# Altium PCB football_robot_main_board.PcbDoc
Units mm, origin at the board's own origin, x right, y up, seen from the top; angles counter-clockwise.
Board outline 50 x 50 mm, 2 copper layers (Top Layer, Bottom Layer), stack 1.571 mm thick; 75 components, 68 nets, 313 pads, 120 vias.
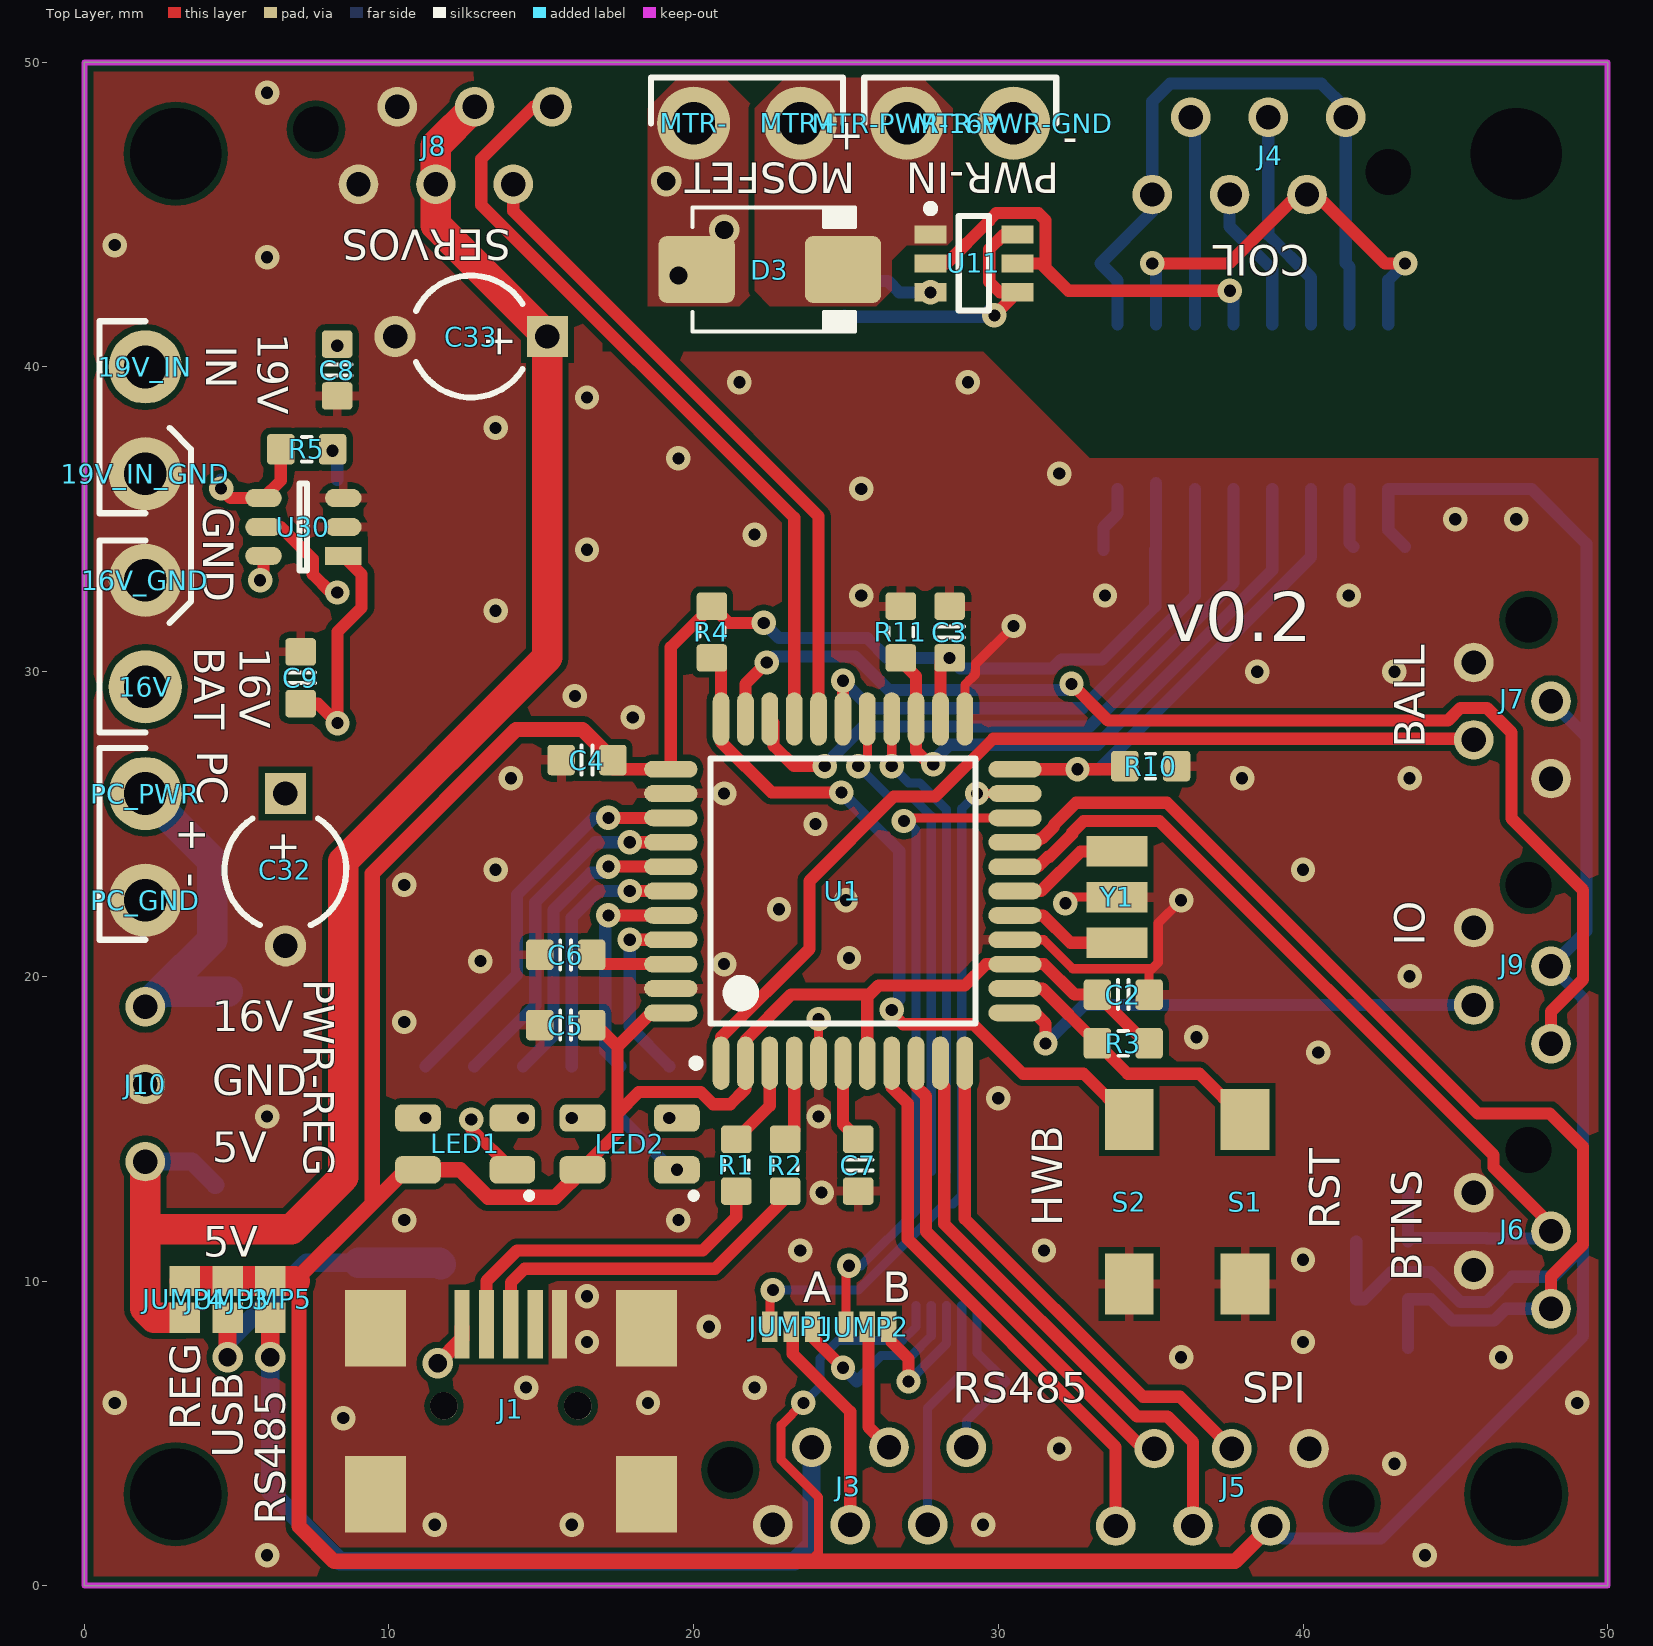
[diagram p0: Top Layer view]
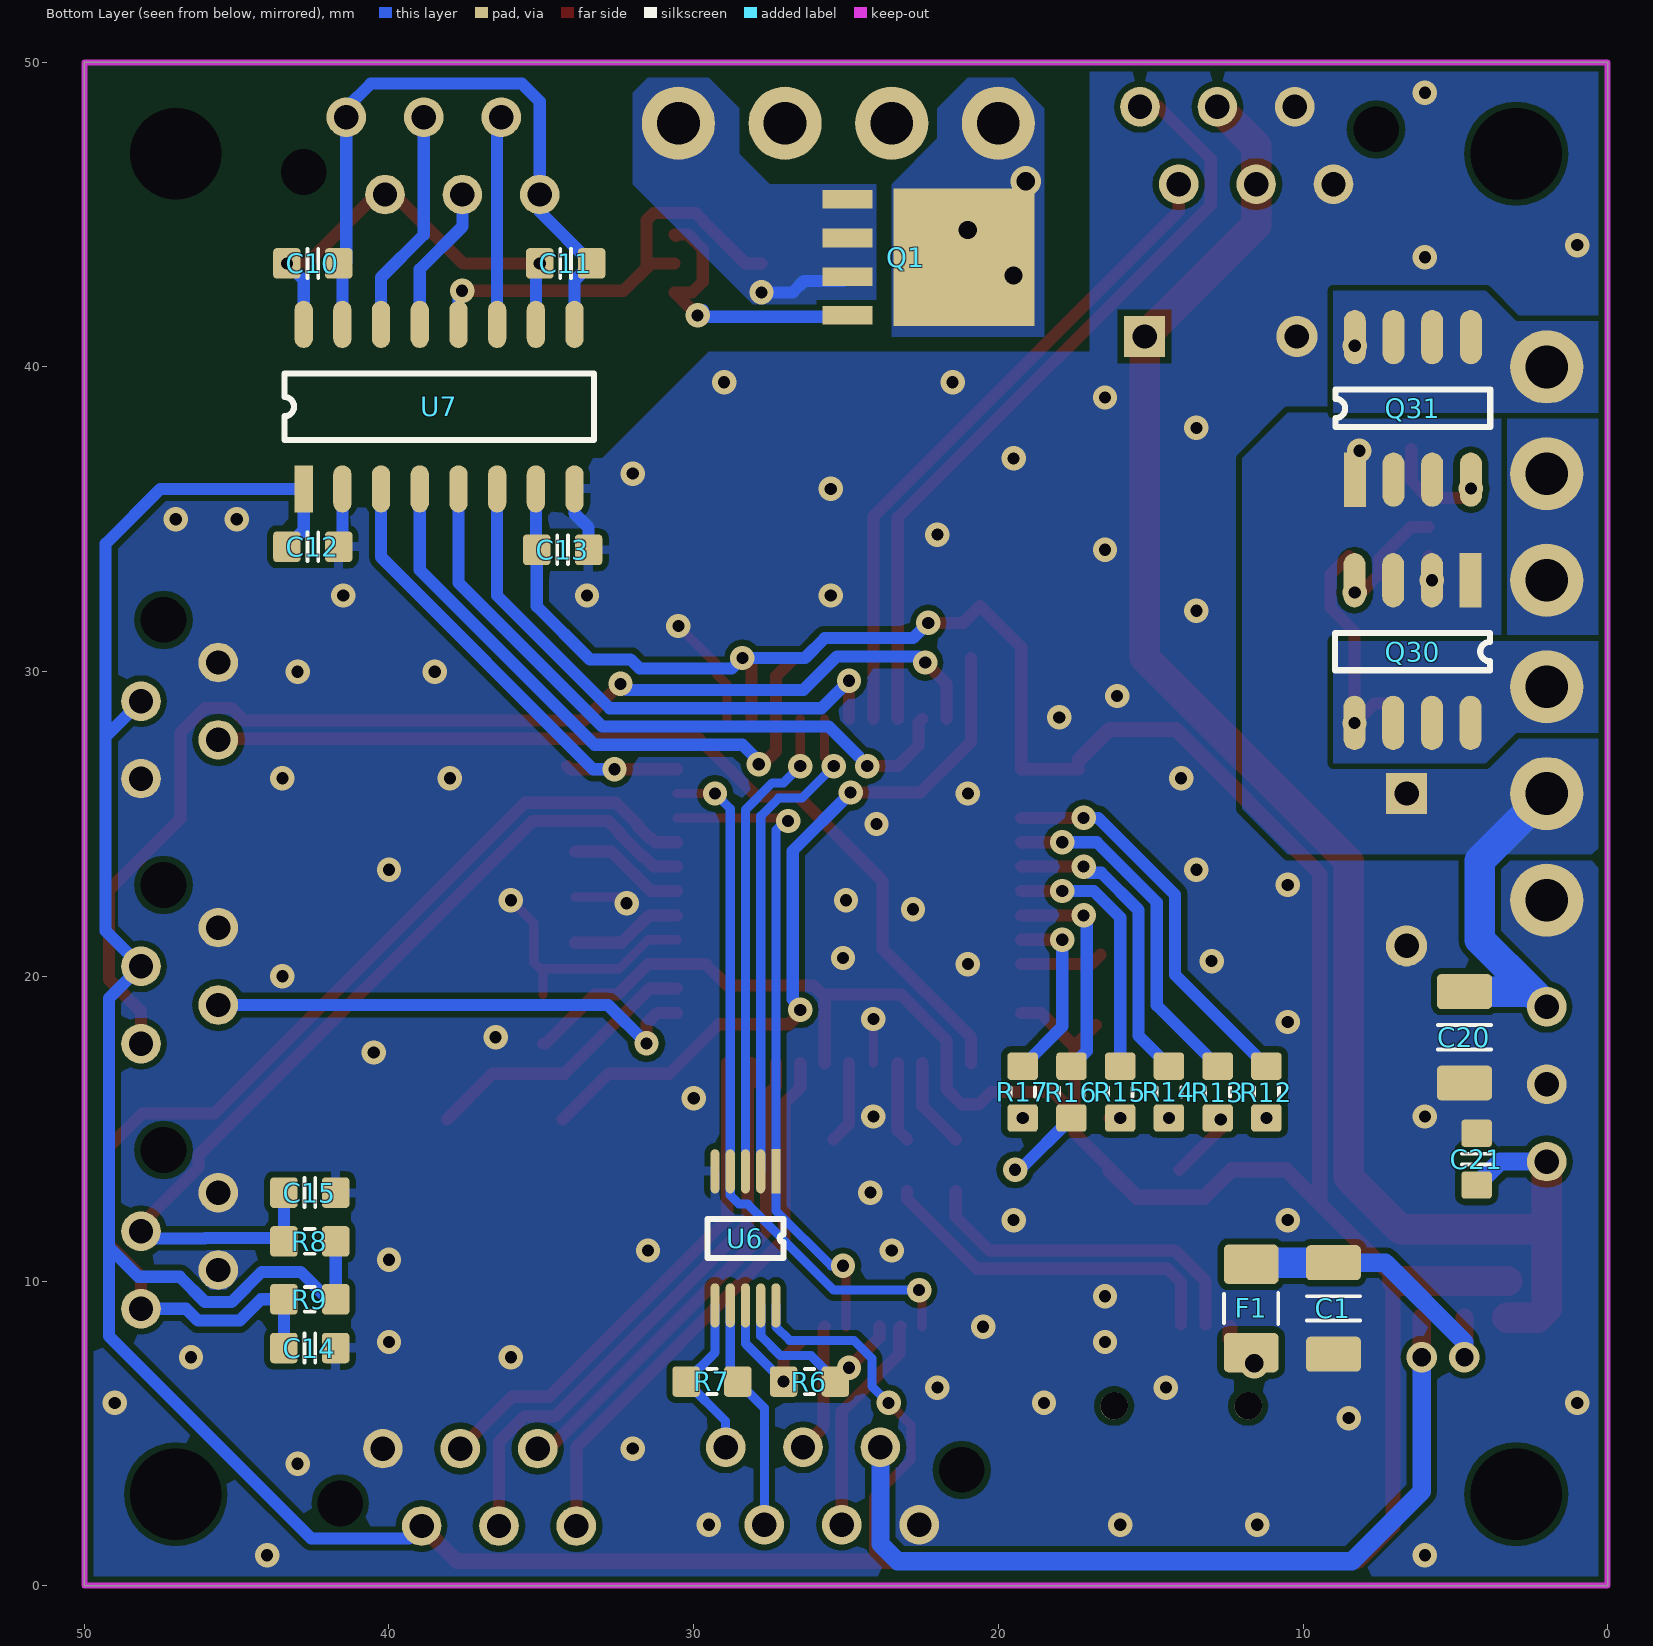
[diagram p1: Bottom Layer view, seen from below]

## Layer stack, top to bottom
Top Solder: solder mask 0.0102, Solder Resist, Dk 3.5
Top Layer: signal copper 0.0356
Dielectric 1: dielectric 1.5, FR-4, Dk 4.8
Bottom Layer: signal copper 0.0356
Bottom Solder: solder mask 0.0102, Solder Resist, Dk 3.5

## Board outline
0,0 50,0 50,50 0,50

## Design rules (kind name [scope] priority, off if disabled: settings)
Clearance [All] p1: gap=0.2
ComponentClearance [All] p1: gap=0.1 collisioncheckmode=3 verticalgap=0.1 showdistances=FALSE
HoleSize [All] p1: absolutevalues=TRUE maxlimit=10 minlimit=0.3 maxpercent=80.000 minpercent=20.000
PolygonConnect PolygonConnectDirect [All vs IsVia or InNet('Net19V_IN_1') or InNet('Net16V_1') or InNet('16V_PC') or InNet('EXT_GND') or InNet('EXT_16V') or InNet('NetD3_A') or HasFootprint('POWER-VIA') or Incomponent('C32') or Incomponent('C33') or Incomponent('J1') or HasFootprint('MICRO-MATCH-4') or HasFootprint('MICRO-MATCH-6') or HasFootprint('PIN-HEADER-3')  or Incomponent('C1') or Incomponent('C20') or Incomponent('C21')] p1: connectstyle=Direct reliefconductorwidth=0.254 reliefentries=4 polygonreliefangle="90 Angle" airgapwidth=0.254
PolygonConnect [All] p2: connectstyle=Relief reliefconductorwidth=0.3 reliefentries=4 polygonreliefangle="90 Angle" airgapwidth=0.2
RoomDefinition football_robot_main_board [InComponentClass('football_robot_main_board')] p1: confinementstyle=ConfineIn formatcopy=TRUE lockcomponents=FALSE outline -7.6,-7.6 57,-7.6 57,54.4 -7.6,54.4
RoutingVias [All] p1: holewidth=0.4 width=0.8 viastyle="Through Hole" minholewidth=0.3 minwidth=0.6 maxholewidth=5 maxwidth=10
SolderMaskExpansion SolderMaskExpansionTentedVIa [IsVia] p1: expansion=-5
SolderMaskExpansion [All] p2: expansion=0.1
Width [All] p1: maxlimit=5 minlimit=0.2 preferedwidth=0.4
28 further rules are at their usual default settings.

## Components (designator, comment, footprint, x,y, rotation, side; value= is the part's Value field where it differs from the comment)
16V "HEADER-1" POWER-VIA 2,29.5 r0 top
16V_GND "HEADER-1" POWER-VIA 2,33 r90 top
19V_IN "HEADER-1" POWER-VIA 2,40 r90 top
19V_IN_GND "HEADER-1" POWER-VIA 2,36.5 r90 top
C1 "10u" CAPC3216X180N 9,9.1 r90 bottom
C2 "100n" CAPC1608X90N 34.1,19.4 r180 top
C3 "100n" CAPC1608X90N 28.4,31.3 r90 top
C4 "100n" CAPC1608X90N 16.5,27.1 r180 top
C5 "100n" CAPC1608X90N 15.8,18.4 r0 top
C6 "100n" CAPC1608X90N 15.8,20.706 r0 top
C7 "1u" CAPC1608X90N 25.4,13.8 r90 top
C8 "100n" CAPC1608X90N 8.3,39.9 r270 top
C9 "100n" CAPC1608X90N 7.1,29.8 r90 top
C10 "100n" CAPC1608X90N 42.5,43.4 r180 bottom
C11 "100n" CAPC1608X90N 34.2,43.4 r180 bottom
C12 "100n" CAPC1608X90N 42.5,34.1 r0 bottom
C13 "100n" CAPC1608X90N 34.3,34 r180 bottom
C14 "100n" CAPC1608X90N 42.6,7.8 r180 bottom
C15 "100n" CAPC1608X90N 42.6,12.9 r180 bottom
C20 "10u" CAPC3216X180N 4.7,18 r90 bottom
C21 "100n" CAPC1608X90N 4.3,14 r270 bottom
C32 "470uF" CAPR5-4X5 6.6,23.5 r270 top
C33 "470uF" CAPR5-4X5 12.7,41 r180 top
D3 "MURS160" DO-214AA 22.5,43.2 r0 top
F1 "500mA" RESC3216X70N 11.7,9.1 r90 bottom
J1 "USB-MINI-B" USB-B-MINI 14,5.9 r0 top
J3 "RS485" MICRO-MATCH-6 22.6,2 r180 top
J4 "COIL" MICRO-MATCH-6 41.4,48.2 r0 top
J5 "SPI" MICRO-MATCH-6 40.2,4.5 r0 top
J6 "BUTTONS" MICRO-MATCH-4 45.6,12.9 r90 top
J7 "BALL" MICRO-MATCH-4 45.6,30.3 r90 top
J8 "SERVO" MICRO-MATCH-6 9,46 r180 top
J9 "IO" MICRO-MATCH-4 45.6,21.6 r90 top
J10 "PWR-REG" PIN-HEADER-3 2,19 r270 top
JUMP1 "Jumper" JUMPER-SMD-3WAY 23.2,8.5 r0 top
JUMP2 "Jumper" JUMPER-SMD-3WAY 25.7,8.5 r0 top
JUMP3 "JUMPER" JUMPER-SMD-1010 4.7,9.4 r90 top
JUMP4 "JUMPER" JUMPER-SMD-1010 3.3,9.4 r90 top
JUMP5 "JUMPER" JUMPER-SMD-1010 6.1,9.4 r90 top
LED1 "RGB-LED" RGB-LED 12.5,14.5 r180 top
LED2 "RGB-LED" RGB-LED 17.9,14.5 r180 top
MTR+ "HEADER-1" POWER-VIA 23.5,48 r90 top
MTR- "HEADER-1" POWER-VIA 20,48 r90 top
MTR-PWR-16V "HEADER-1" POWER-VIA 27,48 r90 top
MTR-PWR-GND "HEADER-1" POWER-VIA 30.5,48 r90 top
PC_GND "HEADER-1" POWER-VIA 2,22.5 r90 top
PC_PWR "HEADER-1" POWER-VIA 2,26 r90 top
Q1 "MOSFET-N" SOT669 22.3,43.6 r180 bottom
Q30 "PMOS" SO8 4.5,33 r270 bottom
Q31 "PMOS" SO8 8.3,36.3 r90 bottom
R1 "22R" RESC1608N_ZERO 21.4,13.8 r90 top
R2 "22R" RESC1608N_ZERO 23,13.8 r90 top
R3 "10k" RESC1608N_ZERO 34.1,17.8 r0 top
R4 "10k" RESC1608N_ZERO 20.6,31.3 r90 top
R5 "470k" RESC1608N_ZERO 7.3,37.3 r180 top
R6 "120R" RESC1608N_ZERO 26.2,6.7 r0 bottom
R7 "120R" RESC1608N_ZERO 29.4,6.7 r0 bottom
R8 "10k" RESC1608N_ZERO 42.6,11.3 r180 bottom
R9 "10k" RESC1608N_ZERO 42.6,9.4 r180 bottom
R10 "10k" RESC1608N_ZERO 35,26.9 r180 top
R11 "10k" RESC1608N_ZERO 26.8,31.3 r270 top
R12 "1k" RESC1608N_ZERO 11.2,16.2 r90 bottom
R13 "1k" RESC1608N_ZERO 12.8,16.2 r90 bottom
R14 "1k" RESC1608N_ZERO 14.4,16.2 r90 bottom
R15 "1k" RESC1608N_ZERO 16,16.2 r90 bottom
R16 "1k" RESC1608N_ZERO 17.6,16.2 r90 bottom
R17 "1k" RESC1608N_ZERO 19.2,16.2 r90 bottom
S1 "RST" DTSM-32S-B 38.1,12.6 r90 top
S2 "HWB" DTSM-32S-B 34.3,12.6 r90 top
U1 "ATmega32U4-AU" 44ML_N 24.9,22.8 r90 top
U6 "SN65HVD3086E" SOP10 27.3,13.6 r270 bottom
U7 "SI8641" SOIC16 42.8,36 r90 bottom
U11 "ZXGD3003E6" SOT23-6-EEPROM 29.2,43.4 r0 top
U30 "LTC4412" TSOT-23-6 8.5,33.8 r180 top
Y1 "Resonator" PBRC16.00MR 33.9,22.6 r90 top

## Footprints (in the part's own frame and the unit in brackets; to place one, negate y for a bottom-side part, rotate by r counter-clockwise, add the part's x,y. Pads: shape width x height; smd on the part's side, far side on the other; paste and mask are expansions set on the pad)
44ML_N [mm] "Thin QFP, 44-Leads, Body 10x10mm, Pitch 0.8mm, IPC Medium Density"
  oval 1.75x0.55 smd: 1(-5.65,4) 2(-5.65,3.2) 3(-5.65,2.4) 4(-5.65,1.6) 5(-5.65,0.8) 6(-5.65,0) 7(-5.65,-0.8) 8(-5.65,-1.6) 9(-5.65,-2.4) 10(-5.65,-3.2) 11(-5.65,-4) 23(5.65,-4) 24(5.65,-3.2) 25(5.65,-2.4) 26(5.65,-1.6) 27(5.65,-0.8) 28(5.65,0) 29(5.65,0.8) 30(5.65,1.6) 31(5.65,2.4) 32(5.65,3.2) 33(5.65,4)
  oval 0.55x1.75 smd: 12(-4,-5.65) 13(-3.2,-5.65) 14(-2.4,-5.65) 15(-1.6,-5.65) 16(-0.8,-5.65) 17(0,-5.65) 18(0.8,-5.65) 19(1.6,-5.65) 20(2.4,-5.65) 21(3.2,-5.65) 22(4,-5.65) 34(4,5.65) 35(3.2,5.65) 36(2.4,5.65) 37(1.6,5.65) 38(0.8,5.65) 39(0,5.65) 40(-0.8,5.65) 41(-1.6,5.65) 42(-2.4,5.65) 43(-3.2,5.65) 44(-4,5.65)
  silkscreen extent -5.77,-4.35 4.35,4.95, body extent -6,-6 6,6, height 1.1
CAPC1608X90N [mm] "Chip Capacitor, Body 1.6x0.8mm, EIA 0603, IPC Medium Density"
  round 0.254 on Mech15: 0(0,0)
  rrect25% 0.9x1 smd: 1(-0.85,0) 2(0.85,0)
  Top Layer pour cut-out: -0.6,0.5 -0.4,0.7 0.4,0.7 0.6,0.5 0.6,-0.5 0.4,-0.7 -0.4,-0.7 -0.6,-0.5
  silkscreen extent -0.18,-0.48 0.18,0.48, body extent -0.85,-0.45 0.85,0.45, height 0.89
CAPC3216X180N [mm] "Chip Capacitor, Body 3.2x1.6mm, 1.8mm H, EIA 1206, IPC Medium Density"
  round 0.508 on Mech15: 0(0,0)
  rrect25% 1.15x1.8 smd: 1(-1.5,0) 2(1.5,0)
  silkscreen extent -0.4,-0.88 0.4,0.88, body extent -1.7,-0.9 1.7,0.9, height 1.8
CAPR5-4X5 [mm] "Capacitor; 2 Leads"
  rect 1.35x1.35 hole 0.8: 1(-2.5,0)
  round 1.35 hole 0.8: 2(2.5,0)
  silkscreen extent -1.69,-2 1.82,2
DO-214AA [mm] "JEDEC DO214 variation AA. SMB"
  round 0.508 on Mech15: 0(0,0)
  rrect25% 2.5x2.2 smd: A(-2.4,0) K(2.4,0)
  silkscreen extent -2.54,-2.03 2.79,2.03, body extent -2.8,-1.97 2.8,1.98, height 2.62
DTSM-32S-B [mm]
  rect 2x1.6 smd: 1(-2.7,0) 2(2.7,0)
  body extent -3,-1.75 3,1.75, height 4
JUMPER-SMD-3WAY [mm]
  rect 0.5x1 smd: 1(-0.7,0) 2(0,0) 3(0.7,0)
JUMPER-SMD-1010 [mm]
  rect 1x1 smd: 1(-0.6,0) 2(0.6,0)
MICRO-MATCH-4 [mm]
  round 1.3 hole 0.8: 1(0,0) 2(-1.27,-2.54) 3(-2.54,0) 4(-3.81,-2.54)
  round 0 hole 1.5 unplated: drill(1.4,-1.8)
  body extent -5.41,-3.77 1.6,1.23, height 4
MICRO-MATCH-6 [mm]
  round 1.3 hole 0.8: 1(0,0) 2(-1.27,-2.54) 3(-2.54,0) 4(-3.81,-2.54) 5(-5.08,0) 6(-6.35,-2.54)
  round 0 hole 1.5 unplated: drill(1.4,-1.8)
  body extent -7.95,-3.77 1.6,1.23, height 4
PBRC16.00MR [mm]
  rect 1x2 smd: 1(-1.5,0) 2(0,0) 3(1.5,0)
  body extent -2.25,-1 2.25,1, height 1.2
PIN-HEADER-3 [mm]
  round 1.3 hole 0.8: 1(0,0) 2(2.54,0) 3(5.08,0)
POWER-VIA [mm]
  round 2.4 hole 1.4: 1(0,0)
RESC1608N_ZERO [mm] "Chip Resistor, Body 1.6x0.8mm, 0603, IPC Medium Density"
  round 0.254 on Mech15: 0(0,0)
  rrect25% 0.9x1 smd: 1(-0.85,0) 2(0.85,0)
  Top Layer pour cut-out: -0.6,0.5 -0.4,0.7 0.4,0.7 0.6,0.5 0.6,-0.5 0.4,-0.7 -0.4,-0.7 -0.6,-0.5
  silkscreen extent -0.15,-0.41 0.15,0.41, body extent -0.87,-0.47 0.88,0.48, height 0.54
RESC3216X70N [mm] "Chip Resistor, Body 3.2x1.6mm, EIA 1206, IPC Medium Density"
  round 0.508 on Mech15: 0(0,0)
  rrect25% 1.3x1.8 smd: 1(-1.45,0) 2(1.45,0)
  silkscreen extent -0.51,-0.89 0.51,0.89, body extent -1.62,-0.82 1.63,0.83, height 0.69
RGB-LED [mm] "WURTH ELEKTRONIK 150141M173100"
  rrect50% 1.5x0.9 smd: 1(1.55,0.85) 2(1.55,-0.85) 3(-1.55,0.85) 4(-1.55,-0.85)
  silkscreen extent -2.2,1.6 -2,1.8, body extent -1.75,-1.4 1.75,1.4, height 1.91
SO8 [mm]
  rect 1.78x0.72 smd: 1(0,0)
  oval 1.78x0.72 smd: 2(0,-1.27) 3(0,-2.54) 4(0,-3.81) 5(4.68,-3.81) 6(4.68,-2.54) 7(4.68,-1.27) 8(4.68,0)
  silkscreen extent 1.72,-4.45 2.96,0.63, body extent -0.56,-4.35 5.21,0.55, height 1.46
SOIC16 [mm]
  rect 1.55x0.6 smd: 1(0,0)
  oval 1.55x0.6 smd: 2(0,-1.27) 3(0,-2.54) 4(0,-3.81) 5(0,-5.08) 6(0,-6.35) 7(0,-7.62) 8(0,-8.89) 9(5.4,-8.89) 10(5.4,-7.62) 11(5.4,-6.35) 12(5.4,-5.08) 13(5.4,-3.81) 14(5.4,-2.54) 15(5.4,-1.27) 16(5.4,0)
  silkscreen extent 1.61,-9.53 3.79,0.63, body extent -0.25,-9.42 5.66,0.57, height 1.46
SOP10 [mm]
  rect 1.45x0.3 smd: 1(0,0)
  oval 1.45x0.3 smd: 2(0,-0.5) 3(0,-1) 4(0,-1.5) 5(0,-2) 6(4.4,-2) 7(4.4,-1.5) 8(4.4,-1) 9(4.4,-0.5) 10(4.4,0)
  silkscreen extent 1.56,-2.25 2.84,0.25, body extent -0.27,-2.5 4.63,0.5, height 1.15
SOT23-6-EEPROM [mm] "SOT23, 6-Leads, Body 2,90x2,70mm, Pitch 0,95mm, IPC Medium Density"
  rect 1.05x0.6 smd: 1(-1.425,0.95) 2(-1.425,0) 3(-1.425,-0.95) 4(1.425,-0.95) 5(1.425,0) 6(1.425,0.95)
  silkscreen extent -1.55,-1.55 0.5,1.92, body extent -1.42,-1.45 1.38,1.45, height 1.45
SOT669 [mil]
  rect 182x178 smd: D(46,0)
  rect 65x24 smd: G(-104.33,-75) S(-104.33,-25) S(-104.33,25) S(-104.33,75)
  body extent -125,-99 135,97, height 43
TSOT-23-6 [mm]
  rect 1.2x0.6 smd: 1(0,0)
  oval 1.2x0.6 smd: 2(0,-0.95) 3(0,-1.9) 4(2.62,-1.9) 5(2.62,-0.95) 6(2.62,0)
  silkscreen extent 1.19,-2.38 1.43,0.48, body extent -0.07,-2.4 2.73,0.5, height 1.45
USB-B-MINI [mm]
  round 0.9 hole 0.9 unplated: 0(-2.2,0) 0(2.2,0)
  rect 0.5x2.25 smd: 1(-1.6,2.675) 2(-0.8,2.675) 3(0,2.675) 4(0.8,2.675) 5(1.6,2.675)
  rect 2x2.5 smd: 6(-4.45,2.55) 7(4.45,2.55) 8(4.45,-2.9) 9(-4.45,-2.9)
  body extent -4.95,-5.9 4.95,3.3, height 4.15

## Part data
C1 C20: library part CAPC_10u_1206_10V, "Capacitor SMD Cer 10uF 10% 10V X5R 1206"
C2 C3 C4 C5 C6 C7 C8 C9 C10 C11 C12 C13 C14 C15 C21: library part CAPC_10n_0603_X7R_50V_10%, "Capacitor SMD Cer 10nF 10% 50V X7R 0603"
C32 C33: library part Cap2, "Capacitor"
D3: library part DIODE_100V_1.5A_SMA, "Diode SMD 100V 1.5A SMA"
F1: library part FUSE_160mA_1206, "Fuse 160mA 63VDC 1206 SMD"
J1: library part USB-B-MINI
J3 J4 J5 J8: library part HEADER-6
J6 J7 J9: library part HEADER-4
J10: library part HEADER-3
JUMP1 JUMP2: library part JUMPER-SMD-3WAY
JUMP3 JUMP4 JUMP5: library part JUMPER-SMD
R1 R2 R3 R4 R5 R6 R7 R8 R9 R10 R11 R12 R13 R14 R15 R16 R17: library part RES_0R_0603, "Resistor SMD chip 0.0 Ohm 0.1W 0603"
S1 S2: library part SW-PB-OPEN
U1: "8-bit AVR Microcontroller, 2.7-5.5V, 32KB Flash, 2.5KB EEPROM, 1KB SRAM, USB Controller, 44-pin TQFP, Industrial Grade (-40°C to 85°C)"
U11: "MOSFET driver"
Y1: library part PBRC16.00MR

## Free pads (board coordinates)
  round 2 hole 3 unplated: 0(3,47) 1(47,47) 2(47,3) 3(3,3)

## Via types
v1: diameter 0.8, hole 0.4, Top Layer to Bottom Layer, 114 vias
v2: diameter 1, hole 0.6, Top Layer to Bottom Layer, 6 vias

## Nets (pads, with @x,y where several pads share a name; then routed paths per layer and width w, separated by ;. In a path a pad name is that pad's centre, name@x,y a point inside that pad or via, vN(x,y) a via of type N, cw(c..) or ccw(c..) an arc to the next point about the centre after c; other vN are vias at no path point)
5V: C2.2 C3.1 C4.1 C5.2 C12.2 C13.1 J5.2 J7.2 J9.2 JUMP3.2 JUMP4.2 JUMP5.2 LED1.1 LED2.1 R3.2 R4.2 R8.2 R9.2 U1.2 U1.7 U1.14 U1.24 U1.34 U1.44 U6.10 U7.1 U7.7 | length 213.2
  Top Layer w0.3: v1(23.6,6) 22.87,5.27 22.87,4.126 24.1,2.896 24.1,1.1 23.8,0.8
  Top Layer w0.4: LED2.1 16.35,13.716 17.5,14.866 17.5,15.5 ; C5.2@16.8,18.4 17.5,17.7 ; C4.1@17.35,26.8 U1.34 19.25,30.8 R4.2 21.15,31.6 v1(22.3,31.6) ; U1.44 18.6,18.8 17.5,17.7 ; U1.7 25.7,19.4 23.195,19.4 21.7,17.905 U1.2 21.7,16.3 21.2,15.8 20.634,15.8 20.234,16.2 18.2,16.2 17.5,15.5 ; 25.769,19.4 26.069,19.7 28.9,19.7 29.6,20.4 U1.14 31.499,20.4 32.499,19.4 C2.2 34.85,17.8 R3.2 ; U1.24 C3.1@28.1,30.35 ; 17.5,15.5 17.5,17.7
  Top Layer w0.5: LED2.1 15.45,12.75 13.245,12.75 12.345,13.65 LED1.1 10.55,13.65 9.45,12.55 ; C4.1 16.35,28.1 14.171,28.1 9.45,23.379 9.45,12.55 ; J5.2 37.77,0.8 23.8,0.8 8.2,0.8 7.05,1.95 7.05,9.636 6.9,9.786 6.9,10 9.45,12.55
  Top Layer w1: JUMP4.2 JUMP3.2 JUMP5.2 6.9,10
  Bottom Layer w0.3: v1(23.6,6) 24.15,6.55 24.15,7.461 24.739,8.05 26.85,8.05 27.3,8.5 U6.10
  Bottom Layer w0.4: v1(22.3,31.6) 22.8,31.1 25.7,31.1 26.35,30.45 v1(28.4,30.45) 28.75,30.1 31.769,30.1 32.069,30.4 33.4,30.4 35.15,32.15 C13.1 35.18,34.03 U7.7 U7.7@35.18,36.195 ; J5.2 39.34,1.55 42.55,1.55 49.19,8.19 49.19,11.105 ; R8.2 R9.2 42,9.4 42.9,10.3 44.175,10.3 45.165,9.31 46.035,9.31 46.865,10.14 48.225,10.14 49.19,11.105 ; C12.2 42.8,34.65 U7.1 47.5,36 49.3,34.2 49.3,27.87 ; J7.2 49.3,27.87 ; 49.19,11.105 49.19,19.28 J9.2 49.3,21.49 49.3,27.87
5V_REG: C21.2 C33.1 J8.3 J8.4 J10.3 JUMP4.1 | length 58.1
  Top Layer w1: JUMP4.1 2.3,8.8 2,9.1 J10.3 2,12 2.3,11.7 6.8,11.7 8.5,13.4 8.5,23.773 15.2,30.473 C33.1 11.54,44.66 J8.3 11.54,47.27 J8.4
  Bottom Layer w0.6: J10.3 3.53,13.92 C21.2
5V_RS485: J3.2 JUMP5.1 | length 28.1
  Top Layer w0.6: v2(6.1,7.5) JUMP5.1
  Bottom Layer w0.4: J3.2@23.64,4.54 J3.2
  Bottom Layer w0.6: v2(6.1,7.5) 6.1,3.1 8.4,0.8 23.3,0.8 23.87,1.37 J3.2
5V_USB: C1.2 F1.2 JUMP3.1 | length 9.9
  Top Layer w0.6: v2(4.7,7.5) JUMP3.1
  Bottom Layer w0.6: v2(4.7,7.5) 4.7,8 7.3,10.6 C1.2
  Bottom Layer w1: C1.2 11.65,10.6 F1.2
16V_PC: C20.2 C32.1 J10.1 PC_PWR.1 Q30.1 Q30.2 Q30.3 Q31.1 Q31.2 Q31.3 R5.1 U30.6 | length 12.9
  Top Layer w0.4: v1(5.77,33) 5.88,33.11 U30.6 ; v1(8.15,37.25) R5.1
  Bottom Layer w0.4: v1(8.15,37.25) 8.3,37.1 Q31.1
  Bottom Layer w1: J10.1 2.5,19.5 ; PC_PWR.1 4.2,23.8 4.2,21.2 2.5,19.5 ; C20.2 2.5,19.5
A: JUMP1.3 R6.1 U6.9 | length 6.5
  Top Layer w0.4: JUMP1.3 23.9,8.15 v1(24.9,7.15)
  Bottom Layer w0.3: R6.1 25.35,6.75 26.15,7.55 27.149,7.55 27.8,8.201 U6.9
  Bottom Layer w0.4: v1(24.9,7.15) R6.1
B: JUMP2.3 R6.2 U6.8 | length 4.5
  Top Layer w0.4: 26.5,8 27.05,7.45 v1(27.05,6.7)
  Bottom Layer w0.3: v1(27.05,6.7) 28.3,7.95 U6.8
BALL: J7.3 U1.1 | length 31.4
  Top Layer w0.4: U1.1 20.9,18 23.8,20.9 23.8,23.131 26.569,25.9 27.931,25.9 29.831,27.8 J7.3@46,27.8 ; J7.3 J7.3@45.6,27.8
BTN1: C15.1 J6.2 R8.1 U1.18 | length 30.8
  Top Layer w0.4: U1.18 31.3,23.6 31.425,23.725 31.43,23.725 31.63,23.925 31.678,23.925 32.425,24.672 32.425,24.725 32.8,25.1 35.285,25.1 46.25,14.135 46.25,13.735 48.14,11.845 J6.2
  Bottom Layer w0.4: R8.1 R8.1@43.45,11.41 ; C15.1 R8.1@43.45,11.41 ; J6.2@48.14,11.415 J6.2 47.91,11.4 46.045,11.4 46.035,11.41 R8.1@43.45,11.41
BTN2: C14.1 J6.4 R9.1 U1.19 | length 36.4
  Top Layer w0.4: U1.19 31.251,24.4 31.376,24.525 31.43,24.525 31.825,24.92 31.825,24.974 32.551,25.7 35.533,25.7 45.733,15.5 48.1,15.5 49.19,14.41 49.19,11.195 48.14,10.145 J6.4 J6.4@48.13,9.1
  Bottom Layer w0.4: C14.1 R9.1 44.201,9.4 44.901,8.7 46.273,8.7 46.663,9.09 J6.4
CHARGE: R11.2 U1.25 U7.4 | length 20.4
  Top Layer w0.4: R11.2@26.8,30.35 27.3,29.85 U1.25 27.3,27.4 27.736,26.964 v1(27.864,26.964)
  Bottom Layer w0.4: v1(27.864,26.964) 27.864,27.064 28.4,27.6 33.251,27.6 38.99,33.339 U7.4
COIL_5V: C10.1 C11.1 J4.2 U7.10 U7.16 | length 14.7
  Top Layer w0.4: v1(35.05,43.4) 37.57,43.4 40.13,45.96 42.69,43.4 v1(43.35,43.4)
  Bottom Layer w0.4: v1(35.05,43.4) 35.18,43.27 U7.10 ; U7.16 42.8,42.85 v1(43.35,43.4)
COIL_CHARGE: J4.4 U7.13 | length 5.1
  Bottom Layer w0.4: J4.4@37.59,45.96 37.59,44.61 38.99,43.21 U7.13
COIL_DONE: J4.5 U7.11 | length 7.2
  Bottom Layer w0.4: J4.5@36.32,48.5 36.45,48.37 U7.11
COIL_GND: C10.2 C11.2 J4.1 J4.6 U7.9 U7.15 | length 22.3
  Bottom Layer w0.4: U7.9 33.91,42.84 C11.2 35.05,45.1 35.05,48.715 35.635,49.3 40.6,49.3 41.4,48.5 41.4,43.41 41.53,43.28 U7.15
COIL_KICK: J4.3 U7.14 | length 7.7
  Bottom Layer w0.4: J4.3@38.86,48.5 38.86,44.34 40.26,42.94 U7.14
D+: R2.2 U1.4 | length 2.6
  Top Layer w0.4: R2.2 23.3,14.95 U1.4
D-: R1.2 U1.3 | length 3
  Top Layer w0.4: R1.2 22.5,15.75 U1.3
DE: U1.26 U6.3 | length 15.8
  Top Layer w0.3: v1(26.5,26.9) U1.26
  Bottom Layer w0.3: v1(26.5,26.9) 27.05,26.35 27.418,26.35 28.3,25.468 U6.3
DONE: U1.28 U7.6 | length 18.2
  Top Layer w0.4: U1.28 v1(24.9,29.7)
  Bottom Layer w0.4: v1(24.9,29.7) 25.8,28.8 32.754,28.8 36.45,32.496 U7.6
EXT_16V: D3.K MTR+.1 MTR-PWR-16V.1 U11.1
EXT_GND: MTR-PWR-GND.1 Q1.S U11.3 | length 3
  Bottom Layer w0.4: Q1.S@24.95,42.965 25.092,42.823 26.377,42.823 26.75,42.45 v1(27.775,42.45)
EXT_PWM: U7.12 U11.2 U11.5 | length 14.6
  Top Layer w0.4: U11.2 28.3,43.4 29.7,44.8 29.7,44.816 29.934,45.05 31.316,45.05 31.55,44.816 31.55,43.25 ; U11.5 31.4,43.4 31.55,43.25 ; v1(37.6,42.5) 32.3,42.5 31.55,43.25
  Bottom Layer w0.4: v1(37.6,42.5) 37.72,42.38 U7.12
GND: 16V_GND.1 19V_IN_GND.1 C1.1 C2.1 C3.2 C4.2 C5.1 C6.1 C7.1 C8.2 C9.2 C12.1 C13.2 C14.2 C15.2 C20.1 C21.1 C32.2 C33.2 J1.5 J1.6 J1.7 J1.8 J1.9 J3.1 J5.1 J6.1 J6.3 J7.1 J7.4 J8.1 J8.2 J9.1 J10.2 PC_GND.1 R10.1 R11.1 S1.1 S2.1 U1.5 U1.15 U1.23 U1.35 U1.43 U6.5 U7.2 U7.8 U30.2 U30.3 Y1.2 | length 19.5
  Top Layer w0.3: U1.5 v1(24.1,18.6) ; U1.23 28.9,29.571 29.25,29.921 29.25,30.25 v1(30.5,31.5) ; U1.15 31.491,21.2 32.441,20.25 35.045,20.25 ; v1(32.2,22.4) 32.4,22.6 Y1.2 ; C2.1 34.95,20.155 35.045,20.25 ; v1(36,22.5) 35.25,21.75 35.25,20.455 35.045,20.25
  Bottom Layer w0.4: C13.2 33.45,34.735 33.91,35.195 U7.8 ; U7.2 41.53,34.22 C12.1
  other v1: 6,1 44,1 11.5,2 16,2 29.5,2 43,4 32,4.5 8.5,5.5 1,6 18.5,6 49,6 14.5,6.5 22,6.5 36,7.5 46.5,7.5 16.5,8 40,8 20.5,8.5 16.5,9.5 40,10.7 23.5,11 31.5,11 10.5,12 19.5,12 24.2,12.9 6,15.4 24.1,15.4 30,16 40.5,17.5 36.5,18 10.5,18.5 43.5,20 21,20.4 13,20.5 25.1,20.6 22.8,22.2 25,22.5 10.5,23 13.5,23.5 40,23.5 24,25 21,26 14,26.5 38,26.5 43.5,26.5 18,28.5 16.1,29.2 38.5,30 43,30 13.5,32 25.5,32.5 33.5,32.5 41.5,32.5 16.5,34 22,34.5 45,35 47,35 25.5,36 32,36.5 19.5,37 13.5,38 16.5,39 21.5,39.5 29,39.5 6,43.6 1,44 6,49
HWB: R4.1 S2.2 U1.33 | length 24.9
  Top Layer w0.4: R4.1@20.9,30.45 U1.33 20.9,27.695 22.56,26.036 v1(24.85,26.036) ; v1@26.4,18.9 26.875,18.425 29.18,18.425 30.805,16.8 32.8,16.8 S2.2
  Bottom Layer w0.4: v1(24.85,26.036) 24.85,26.019 26.75,24.119 26.75,19.25 v1@26.4,18.9
  other v1: 26.5,18.9
KICK: R10.2 U1.22 U7.3 | length 16.4
  Top Layer w0.4: U1.22 v1(32.6,26.8) 34.05,26.8 R10.2
  Bottom Layer w0.4: v1(32.6,26.8) 33.3,26.8 40.26,33.76 U7.3
LED1B: R12.2 U1.36 | length 13
  Top Layer w0.4: v1(17.2,25.2) U1.36
  Bottom Layer w0.4: R12.2 14.2,20.05 14.2,22.677 16.723,25.2 v1(17.2,25.2)
LED1G: R14.2 U1.38 | length 10
  Top Layer w0.4: v1(17.2,23.6) U1.38
  Bottom Layer w0.4: R14.2 15.4,18.05 15.4,22.18 16.62,23.4 17,23.4 v1(17.2,23.6)
LED1R: R13.2 U1.37 | length 11.5
  Top Layer w0.4: v1(17.9,24.4) U1.37
  Bottom Layer w0.4: R13.2 14.8,19.05 14.8,22.428 16.772,24.4 v1(17.9,24.4)
LED2B: R15.2 U1.39 | length 8.5
  Top Layer w0.4: v1(17.9,22.8) U1.39
  Bottom Layer w0.4: R15.2 16,21.931 16.869,22.8 v1(17.9,22.8)
LED2G: R17.2 U1.41 | length 6
  Top Layer w0.4: v1(17.9,21.2) U1.41
  Bottom Layer w0.4: v1(17.9,21.2) 17.9,18.35 R17.2
LED2R: R16.2 U1.40 | length 7.2
  Top Layer w0.4: v1(17.2,22) U1.40
  Bottom Layer w0.4: v1(17.2,22) 17.1,21.9 17.1,17.55 R16.2
MISO: J5.3 U1.11 | length 17
  Top Layer w0.4: U1.11 28.9,12.046 34.746,6.2 35.96,6.2 J5.3
MOSI: J5.4 U1.10 | length 19.2
  Top Layer w0.4: U1.10 28.1,16.5 28.225,16.375 28.225,11.872 34.547,5.55 35.555,5.55 36.39,4.715 J5.4
Net16V_1: 16V.1 C9.1 Q30.5 Q30.6 Q30.7 Q30.8 U30.1 | length 7.6
  Top Layer w0.4: C9.1 7.67,28.95 v1(8.31,28.31) 8.31,31.31 9.1,32.1 9.1,33.2 U30.1
  Bottom Layer w0.4: v1(8.31,28.31) Q30.5
Net19V_IN_1: 19V_IN.1 C8.1 Q31.5 Q31.6 Q31.7 Q31.8 | length 0
  Top Layer w0.4: v1(8.3,40.7) C8.1
NetC6_2: C6.2 U1.42 | length 2.7
  Top Layer w0.4: C6.2 16.956,20.4 U1.42
NetC7_2: C7.2 U1.6 | length 2.7
  Top Layer w0.4: U1.6 24.9,15.15 C7.2
NetD3_A: D3.A MTR-.1 Q1.D
  other v2: 19.5,43 21,44.5 19.1,46.1
NetF1_1: F1.1 J1.1 | length 1.5
  Top Layer w0.5: v2(11.6,7.3) 12.4,8.1 J1.1@12.4,8.475
NetJ1_2: J1.2 R1.1 | length 11.3
  Top Layer w0.4: J1.2 13.2,10 14.2,11 20.3,11 21.4,12.1 R1.1
NetJ1_3: J1.3 R2.1 | length 11.8
  Top Layer w0.4: J1.3 14,9.951 14.449,10.4 20.7,10.4 23,12.7 R2.1
NetJ3_3: J3.3 JUMP1.2 | length 7.3
  Top Layer w0.4: JUMP1.2 23.25,8.45 23.25,7.6 25.14,5.71 J3.3
NetJ3_4: J3.4 JUMP2.2 | length 4.3
  Top Layer w0.4: JUMP2.2 25.74,8.46 25.74,5.21 J3.4
NetLED1_2: LED1.2 R12.1 | length 0.3
  Top Layer w0.4: LED1.2 v1(11.2,15.35)
NetLED1_3: LED1.3 R13.1 | length 2.3
  Top Layer w0.4: v1(12.7,15.3) 12.7,15 LED1.3
  Bottom Layer w0.4: v1(12.7,15.3) 12.75,15.3 R13.1
NetLED1_4: LED1.4 R14.1
  other v1: 14.4,15.35
NetLED2_2: LED2.2 R15.1 | length 0.4
  Top Layer w0.4: v1(16,15.35) LED2.2
NetLED2_3: LED2.3 R16.1 | length 2.6
  Bottom Layer w0.4: R16.1 19.3,13.65 v1(19.45,13.65)
NetLED2_4: LED2.4 R17.1
  other v1: 19.2,15.35
NetQ1_G: Q1.G U11.4 U11.6 | length 9.6
  Top Layer w0.4: v1(29.87,41.695) U11.4 30.05,42.45 29.7,42.8 29.7,43.866 30.184,44.35 U11.6 U11.6@30.575,44.3
  Bottom Layer w0.4: Q1.G 24.995,41.65 29.825,41.65 v1(29.87,41.695) v1@29.7,41.865
NetQ30_4: Q30.4 U30.5 | length 3.6
  Top Layer w0.4: U30.5 6.45,34.75 7.5,33.7 7.5,33.2 8.1,32.6 v1(8.3,32.6)
NetQ31_4: Q31.4 R5.2 U30.4 | length 3.6
  Top Layer w0.4: v1(4.49,36.01) 4.8,35.7 U30.4 6.45,36.27 R5.2
  Bottom Layer w0.4: v1(4.49,36.01) Q31.4
NetU1_16: U1.16 Y1.1 | length 3.7
  Top Layer w0.4: U1.16 31.469,22 32.369,21.1 Y1.1
NetU1_17: U1.17 Y1.3 | length 3.9
  Top Layer w0.4: U1.17 31.402,22.8 32.702,24.1 Y1.3
PB7: J9.3 U1.12 | length 16.8
  Top Layer w0.4: U1.12 31.2,18.8 31.55,18.45 v1(31.55,17.8)
  Bottom Layer w0.4: v1(31.55,17.8) 32.81,19.06 J9.3@46,19.06
PC7: J9.4 U1.32 | length 39.8
  Top Layer w0.4: U1.32 21.7,29.6 v1(22.4,30.3) ; v1(32.4,29.6) 33.6,28.4 44.755,28.4 45.165,28.81 46.035,28.81 46.845,28 46.845,25.181 49.19,22.836 49.19,19.895 48.14,18.845 J9.4
  Bottom Layer w0.4: v1(22.4,30.3) 22.6,30.5 25.3,30.5 26.4,29.4 32.2,29.4 v1(32.4,29.6)
PWM1A: J8.5 U1.29 | length 21.7
  Top Layer w0.4: J8.5 14.08,45.119 24.1,35.099 U1.29
PWM1B: J8.6 U1.30 | length 25.7
  Top Layer w0.4: J8.6 14.74,48.54 13.03,46.83 13.03,45.32 23.3,35.05 U1.30
PWM3A: U1.31 U7.5 | length 21.4
  Top Layer w0.4: U1.31 22.625,28.325 22.625,27.57 23.295,26.9 v1(24.3,26.9)
  Bottom Layer w0.4: 24.6,27.231 25.569,28.2 33.003,28.2 37.72,32.917 U7.5
RE: U1.27 U6.2 | length 16.4
  Top Layer w0.3: v1(25.4,26.9) 25.7,27.2 U1.27
  Bottom Layer w0.3: v1(25.4,26.9) 26.45,25.85 27.211,25.85 27.8,25.261 U6.2
RESET: R3.1 S1.2 U1.13 | length 9.3
  Top Layer w0.4: U1.13 31.45,19.6 R3.1 34.25,16.8 36.6,16.8 S1.2
RX: JUMP2.1 U1.20 U6.1 | length 21.7
  Top Layer w0.3: JUMP2.1 25,10.4 v1(25.1,10.5) ; v1(26.9,25.1) 27,25.2 U1.20
  Bottom Layer w0.3: v1(25.1,10.5) 25.488,10.5 27.3,12.312 U6.1 27.3,24.8 27,25.1 v1(26.9,25.1)
SCLK: J5.5 U1.9 | length 16.1
  Top Layer w0.4: U1.9 27.3,16.395 27.625,16.07 27.625,11.624 34.749,4.5 J5.5
SS: J5.6 U1.8 | length 18.2
  Top Layer w0.4: U1.8 26.5,16.347 27.025,15.822 27.025,11.375 33.85,4.55 J5.6
TX: JUMP1.1 U1.21 U6.4 | length 23.4
  Top Layer w0.3: JUMP1.1 22.5,9.6 v1(22.6,9.7) ; v1(29.3,26) U1.21
  Bottom Layer w0.3: v1(22.6,9.7) 25.4,9.7 28.225,12.525 28.507,12.525 28.8,12.818 U6.4 28.8,25.5 v1(29.3,26)
Y: J3.6 R7.2 U6.6 | length 5.6
  Bottom Layer w0.3: J3.6 28.95,5.4 R7.2 29.3,7.65 U6.6
Z: J3.5 R7.1 U6.7 | length 7.7
  Bottom Layer w0.3: J3.5 27.68,5.83 R7.1 28.8,6.95 U6.7
pads on no net: C1.0 C2.0 C3.0 C4.0 C5.0 C6.0 C7.0 C8.0 C9.0 C10.0 C11.0 C12.0 C13.0 C14.0 C15.0 C20.0 C21.0 D3.0 F1.0 J1.0 J1.4 J3.drill J4.drill J5.drill J6.drill J7.drill J8.drill J9.drill R1.0 R2.0 R3.0 R4.0 R5.0 R6.0 R7.0 R8.0 R9.0 R10.0 R11.0 R12.0 R13.0 R14.0 R15.0 R16.0 R17.0

## Polygon pours and split planes (outlines as drawn)
Net16V_1 on Bottom Layer "Top Layer-No Net 1" (solid, remove dead copper, pour order 2): 0,28 3,28 4,27 9,27 9,31 0,31
Net19V_IN_1 on Bottom Layer "Top Layer-No Net 1" (solid, remove dead copper, pour order 4): 0,38.5 9,38.5 9,42.5 4,42.5 3,41.5 0,41.5
16V_PC on Bottom Layer "Top Layer-No Net 1" (solid, remove dead copper, pour order 6): 3.5,31 3.5,38.5 10.5,38.5 12,37 12,25.5 10.5,24 0,24 0,28 2.926,28 4,27 9,27 9,31
EXT_GND on Bottom Layer "Top Layer-No Net 1" (solid, remove dead copper, pour order 10): 31.5,49.5 32,49 32,46 28,42 24,42 24,46 27.5,46 28.5,47 28.5,48.5 29.5,49.5
NetD3_A on Bottom Layer "Top Layer-No Net 1" (solid, remove dead copper, pour order 14): 19.5,49.5 18.5,48.5 18.5,41 23.5,41 23.5,46 22,47.5 22,48.5 21,49.5
GND on Bottom Layer "Top Layer-No Net 1" (solid, remove dead copper, pour order 20): 0,0 50,0 50,37 33,37 29.5,40.5 17,40.5 17,50 0,50
EXT_16V on Top Layer "Top Layer-No Net 1" (solid, remove dead copper, pour order 12): 27.5,49.5 28.5,48.5 28.5,47 28.5,44 27,44 26.5,43.5 26.5,42.5 26,42 22.5,42 22,42.5 22,48.5 23,49.5
NetD3_A on Top Layer "Top Layer-No Net 1" (solid, remove dead copper, pour order 16): 18.5,48.5 19.5,49.5 21,49.5 22,48.5 22,42.5 21.5,42 18.5,42
GND on Top Layer "Top Layer-No Net 1" (solid, remove dead copper, pour order 18): 0,0 50,0 50,37 33,37 29.5,40.5 17,40.5 17,50 0,50

## Keep-outs
Keep-Out Layer:
  lines w0.2: 50,0 0,0 0,50 50,50 50,0 ; 50,0 50,0

## Silkscreen, mask and mechanical layers (free items; w line width, h text height)
Top Overlay:
  lines w0.2: 2,21.2 0.5,21.2 0.5,27.5 2,27.5 ; 2,28 0.5,28 0.5,34.3 2,34.3 ; 2,35.2 0.5,35.2 0.5,41.5 2,41.5 ; 2.8,31.6 3.5,32.3 3.5,37.3 2.8,38 ; 18.6,48 18.6,49.5 24.9,49.5 24.9,48 ; 25.6,48 25.6,49.5 31.9,49.5 31.9,48
  text "+" at 25.6,48 h1 r180
  text "-" at 32.6,47.8 h1 r180
  text "MOSFET" at 25.3,46.7 h1 r180
  text "PWR-IN" at 32,46.7 h1 r180
  text "SERVOS" at 14,44.5 h1 r180
  text "COIL" at 40.2,44 h1 r180
  text "+" at 13.2,41.4 h1 r270
  text "19V" at 5.7,41.1 h1 r270
  text "IN" at 4,40.7 h1 r270
  text "GND" at 3.9,35.4 h1 r270
  text "v0.2" at 35.5,31 h1.6
  text "BAT" at 3.6,30.8 h1 r270
  text "16V" at 5.1,30.8 h1 r270
  text "BALL" at 44,27.5 h1 r90
  text "PC" at 3.7,27.4 h1 r270
  text "+" at 3.1,25.2 h1 r270
  text "+" at 6.1,24.8 h1 r270
  text "-" at 3.1,23.4 h1 r270
  text "IO" at 44,21 h1 r90
  text "PWR-REG" at 7.2,19.9 h1 r270
  text "16V" at 4.2,18.2 h1
  text "GND" at 4.2,16.1 h1
  text "5V" at 4.2,13.9 h1
  text "HWB" at 32.1,11.8 h1 r90
  text "RST" at 41.2,11.7 h1 r90
  text "5V" at 3.9,10.8 h1
  text "BTNS" at 43.9,10 h1 r90
  text "A" at 23.6,9.3 h1
  text "B" at 26.2,9.3 h1
  text "RS485" at 28.5,6 h1
  text "SPI" at 38,6 h1
  text "REG" at 3.8,5.1 h1 r90
  text "USB" at 5.2,4.2 h1 r90
  text "RS485" at 6.6,2 h1 r90